# Altium PCB PCB1.PcbDoc (part 3 of 6)
Units mil, origin at the board's own origin, x right, y up, seen from the top; angles counter-clockwise.
Board outline 1280 x 1960 mil, 2 copper layers (Top Layer, Bottom Layer); 45 components, 63 nets, 326 pads, 83 vias.
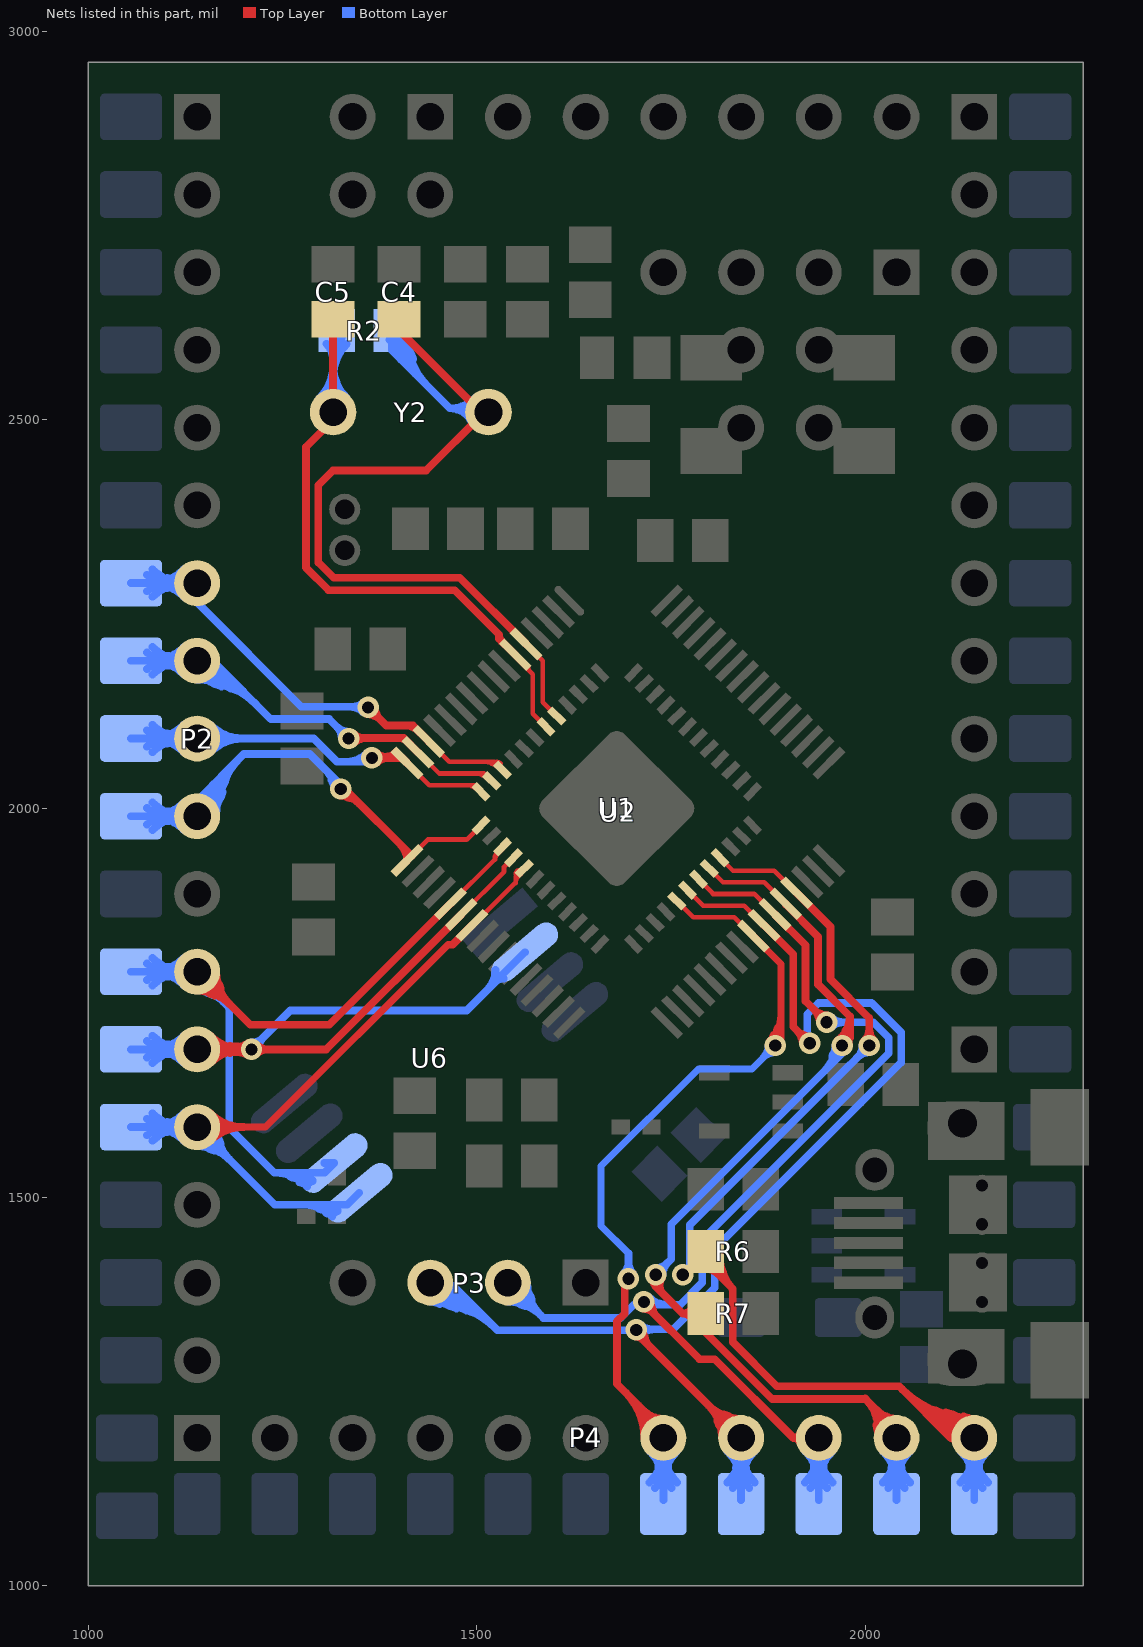
[diagram p3: the nets of this part, all layers, seen from the top]

## Via types
v1: diameter 27.56, hole 15.75, Top Layer to Bottom Layer, tented both sides, 79 vias
v2: diameter 23.62, hole 13.78, Top Layer to Bottom Layer, tented both sides, 3 vias
v3: diameter 23.62, hole 13.78, Top Layer to Bottom Layer, tented top, 1 vias

## Nets (pads, with @x,y where several pads share a name; then routed paths per layer and width w, separated by ;. In a path a pad name is that pad's centre, name@x,y a point inside that pad or via, vN(x,y) a via of type N, cw(c..) or ccw(c..) an arc to the next point about the centre after c; other vN are vias at no path point) (continued)
OSCI: C4.2 R2.1 U1.5 U2.5 Y2.1 | length 1734.6
  Top Layer w6: U2.5@1563.36,2211.56 1585,2189.92 1585,2136.76 U1.5@1602.75,2119.01 U1.5@1602.75,2121.5
  Top Layer w10: C4.2@1405,2619.57 1405,2610 Y2.1@1507.5,2507.5 ; Y2.1@1515,2515 Y2.1@1507.5,2507.5 ; U2.5@1563.36,2211.56 1478.14,2296.78 1315.85,2296.78 1296,2316.63 1296,2416 1315,2435 1435,2435 Y2.1@1507.5,2507.5
  Bottom Layer w10: R2.1@1387.18,2603.08 cw(c1374.23,2571.37) 1407.32,2580.24 ; R2.1@1390.43,2615 1390.43,2589.57 1465,2515 ; R2.1@1391.1,2612.27 cw(c1364.19,2563.59) 1417.92,2577.98 ; R2.1@1404.91,2589.21 cw(c1420.87,2593.49) R2.1@1406.56,2601.75 ; Y2.1@1515,2515 1465,2515 ; 1465,2515 cw(c1465,2483.34) 1492.94,2498.24 ccw(c1465,2483.34) 1465,2515 ; R2.1@1389.05,2611.06 ccw(c1437.62,2611.06) 1403.28,2576.72 cw(c1437.62,2611.06) R2.1@1389.05,2611.06 ; R2.1@1399.05,2611.06 ccw(c1471.77,2611.06) 1420.35,2559.65 cw(c1471.77,2611.06) R2.1@1399.05,2611.06 ; R2.1@1409.05,2611.06 ccw(c1505.91,2611.06) 1437.42,2542.58 cw(c1505.91,2611.06) R2.1@1409.05,2611.06 ; 1466.72,2515 ccw(c1466.72,2558.28) 1497.32,2527.68 cw(c1466.72,2558.28) 1466.72,2515 ; 1481.67,2515 cw(c1481.67,2492.22) 1501.76,2502.94 ccw(c1481.67,2492.22) 1481.67,2515
OSCO: C5.2 R2.2 U1.6 U2.6 Y2.2 | length 1400.7
  Top Layer w6: U2.6@1549.44,2197.64 1549.44,2195.26 1571.81,2172.88 1571.81,2122.11 U1.6@1588.83,2105.09 ; U2.6@1565.58,2183.5 ccw(c1576.17,2183.5) 1568.68,2176.01 cw(c1576.17,2183.5) U2.6@1565.58,2183.5
  Top Layer w10: C5.2@1315,2619.57 1315,2515 1315,2500 1280,2465 1280,2310 1309.22,2280.78 1471.51,2280.78 1528.65,2223.65 ; U2.6@1549.44,2197.64 1528.65,2218.43 1528.65,2223.65 ; 1528.65,2223.64 ccw(c1542.55,2223.64) 1535.3,2211.78 cw(c1542.55,2223.64) 1528.65,2223.64
  Bottom Layer w10: Y2.2@1315,2515 1315,2610.43 R2.2@1319.57,2615 ; 1315,2546.21 cw(c1278.79,2546.21) 1304.39,2520.61 ccw(c1278.79,2546.21) 1315,2546.21 ; 1315,2546.21 ccw(c1351.21,2546.21) 1325.61,2520.61 cw(c1351.21,2546.21) 1315,2546.21 ; 1315,2570.36 cw(c1254.64,2570.36) 1297.32,2527.68 ccw(c1254.64,2570.36) 1315,2570.36 ; 1315,2570.36 ccw(c1375.36,2570.36) 1332.68,2527.68 cw(c1375.36,2570.36) 1315,2570.36 ; R2.2@1306.4,2597.9 cw(c1285.63,2577.13) 1315,2577.13 ccw(c1285.63,2577.13) R2.2@1306.4,2597.9 ; 1315,2555.08 cw(c1375.55,2555.08) 1332.73,2597.9 ccw(c1375.55,2555.08) 1315,2555.08 ; 1315,2579.22 cw(c1351.41,2579.22) 1325.66,2604.97 ccw(c1351.41,2579.22) 1315,2579.22
PA0: P2.7 pad.1@1055,2290 U1.10 U2.14 | length 1775.8
  Top Layer w6: U2.14@1438.08,2086.28 1464.37,2060 1522.56,2060 U1.10@1533.15,2049.41 ; 1518.76,2057.93 ccw(c1524.24,2067.44) U1.10@1527.08,2056.84 ; 1510.83,2060 cw(c1510.83,2038.23) 1526.22,2053.62 ccw(c1510.83,2038.23) 1510.83,2060 ; 1525.31,2060 cw(c1525.31,2052.71) 1530.47,2057.87 ccw(c1525.31,2052.71) 1525.31,2060
  Top Layer w10: v1@1358.8,2129.76 ccw(c1372.87,2132.64) 1369.15,2118.77 ; v1(1360,2130) 1383.34,2106.66 1417.71,2106.66 U2.14@1438.08,2086.28 ; v1@1360.24,2131.2 cw(c1357.36,2117.13) 1371.23,2120.85 ; 1374.99,2115.01 cw(c1389.98,2130) 1368.78,2130 ccw(c1389.98,2130) 1374.99,2115.01 ; 1374.99,2115.01 ccw(c1360,2100.02) 1360,2121.22 cw(c1360,2100.02) 1374.99,2115.01 ; 1408.89,2106.66 cw(c1408.89,2085.38) 1423.94,2100.43 ccw(c1408.89,2085.38) 1408.89,2106.66
  Bottom Layer w10: pad.1@1055,2290 P2.7@1140,2290 1140,2265 1274,2131 1359,2131 v1(1360,2130) ; P2.7@1116.78,2282.1 ccw(c1095.78,2274.96) 1101.52,2296.39 ccw(c1105.72,2312.07) P2.7@1119.38,2303.28 ; P2.7@1116.78,2297.9 cw(c1095.78,2305.04) 1101.52,2283.61 cw(c1105.72,2267.93) P2.7@1119.38,2276.72 ; pad.1@1080.79,2290 cw(c1080.79,2230.79) 1122.66,2272.66 ccw(c1080.79,2230.79) pad.1@1080.79,2290 ; pad.1@1080.79,2290 ccw(c1080.79,2349.21) 1122.66,2307.34 cw(c1080.79,2349.21) pad.1@1080.79,2290 ; pad.1@1086.36,2277.01 cw(c1099.56,2268.97) 1103.56,2283.9 ; pad.1@1086.36,2277.01 cw(c1099.56,2268.97) 1103.56,2283.9 ; pad.1@1086.36,2277.01 cw(c1099.56,2268.97) 1103.56,2283.9 ; pad.1@1086.36,2302.99 ccw(c1099.56,2311.03) 1103.56,2296.1 ; pad.1@1086.36,2302.99 ccw(c1099.56,2311.03) 1103.56,2296.1 ; pad.1@1086.36,2302.99 ccw(c1099.56,2311.03) 1103.56,2296.1 ; pad.1@1088.73,2282.12 cw(c1109.12,2275.35) 1103.56,2296.1 ; pad.1@1088.73,2282.12 cw(c1109.12,2275.35) 1103.56,2296.1 ; pad.1@1088.73,2282.12 cw(c1109.12,2275.35) 1103.56,2296.1 ; pad.1@1088.73,2297.88 ccw(c1109.12,2304.65) 1103.56,2283.9 ; pad.1@1088.73,2297.88 ccw(c1109.12,2304.65) 1103.56,2283.9 ; pad.1@1088.73,2297.88 ccw(c1109.12,2304.65) 1103.56,2283.9 ; 1101.21,2290 cw(c1101.21,2326.21) 1075.61,2300.61 ccw(c1101.21,2326.21) 1101.21,2290 ; 1101.21,2290 ccw(c1101.21,2253.79) 1075.61,2279.39 cw(c1101.21,2253.79) 1101.21,2290 ; 1104.93,2290 cw(c1104.93,2254.93) 1129.73,2279.73 ccw(c1104.93,2254.93) 1104.93,2290 ; 1104.93,2290 ccw(c1104.93,2325.07) 1129.73,2300.27 cw(c1104.93,2325.07) 1104.93,2290 ; P2.7@1125.36,2290 cw(c1125.36,2350.36) 1082.68,2307.68 ccw(c1125.36,2350.36) P2.7@1125.36,2290 ; P2.7@1125.36,2290 ccw(c1125.36,2229.64) 1082.68,2272.32 cw(c1125.36,2229.64) P2.7@1125.36,2290 ; 1336.39,2131 cw(c1336.39,2106.39) 1353.79,2123.79 ccw(c1336.39,2106.39) 1336.39,2131 ; 1341.22,2131 ccw(c1341.22,2148.78) 1353.79,2136.21 cw(c1341.22,2148.78) 1341.22,2131
PA1: P2.8 pad.1@1055,2190 U1.11 U2.15 | length 2194.5
  Top Layer w6: U2.15@1424.17,2072.36 1451.53,2045 1509.72,2045 U1.11@1519.23,2035.49 ; 1505.13,2043.85 ccw(c1510.22,2052.67) U1.11@1513.12,2042.9 ; 1499.52,2045 cw(c1499.52,2026.92) 1512.3,2039.7 ccw(c1499.52,2026.92) 1499.52,2045
  Top Layer w10: v1(1335,2090) 1335.66,2090.66 1405.87,2090.66 U2.15@1424.17,2072.36 ; v1@1341.21,2083.79 cw(c1357.79,2067.21) 1357.79,2090.66 ccw(c1357.79,2067.21) v1@1341.21,2083.79 ; v1@1341.21,2096.21 ccw(c1354.6,2109.6) 1354.6,2090.66 cw(c1354.6,2109.6) v1@1341.21,2096.21 ; 1400,2090.66 cw(c1400,2076.48) 1410.02,2086.51 ccw(c1400,2076.48) 1400,2090.66
  Bottom Layer w10: pad.1@1055,2190 P2.8@1140,2190 1160,2190 1235,2115 1310,2115 v1(1335,2090) ; P2.8@1116.78,2182.1 ccw(c1095.78,2174.96) 1101.52,2196.39 ccw(c1105.72,2212.07) P2.8@1119.38,2203.28 ; P2.8@1116.78,2197.9 cw(c1095.78,2205.04) 1101.52,2183.61 cw(c1105.72,2167.93) P2.8@1119.38,2176.72 ; P2.8@1135.03,2187.7 ccw(c1186.01,2211.29) 1171.47,2157.04 ; P2.8@1144.11,2191.9 ccw(c1211.26,2222.98) 1192.11,2151.51 ; P2.8@1144.3,2191.41 ccw(c1178.9,2202.74) 1169.48,2167.57 ; pad.1@1080.79,2190 cw(c1080.79,2130.79) 1122.66,2172.66 ccw(c1080.79,2130.79) pad.1@1080.79,2190 ; pad.1@1080.79,2190 ccw(c1080.79,2249.21) 1122.66,2207.34 cw(c1080.79,2249.21) pad.1@1080.79,2190 ; pad.1@1086.36,2177.01 cw(c1099.56,2168.97) 1103.56,2183.9 ; pad.1@1086.36,2177.01 cw(c1099.56,2168.97) 1103.56,2183.9 ; pad.1@1086.36,2177.01 cw(c1099.56,2168.97) 1103.56,2183.9 ; pad.1@1086.36,2202.99 ccw(c1099.56,2211.03) 1103.56,2196.1 ; pad.1@1086.36,2202.99 ccw(c1099.56,2211.03) 1103.56,2196.1 ; pad.1@1086.36,2202.99 ccw(c1099.56,2211.03) 1103.56,2196.1 ; pad.1@1088.73,2182.12 cw(c1109.12,2175.35) 1103.56,2196.1 ; pad.1@1088.73,2182.12 cw(c1109.12,2175.35) 1103.56,2196.1 ; pad.1@1088.73,2182.12 cw(c1109.12,2175.35) 1103.56,2196.1 ; pad.1@1088.73,2197.88 ccw(c1109.12,2204.65) 1103.56,2183.9 ; pad.1@1088.73,2197.88 ccw(c1109.12,2204.65) 1103.56,2183.9 ; pad.1@1088.73,2197.88 ccw(c1109.12,2204.65) 1103.56,2183.9 ; 1101.21,2190 cw(c1101.21,2226.21) 1075.61,2200.61 ccw(c1101.21,2226.21) 1101.21,2190 ; 1101.21,2190 ccw(c1101.21,2153.79) 1075.61,2179.39 cw(c1101.21,2153.79) 1101.21,2190 ; 1104.93,2190 cw(c1104.93,2154.93) 1129.73,2179.73 ccw(c1104.93,2154.93) 1104.93,2190 ; 1104.93,2190 ccw(c1104.93,2225.07) 1129.73,2200.27 cw(c1104.93,2225.07) 1104.93,2190 ; P2.8@1125.36,2190 cw(c1125.36,2250.36) 1082.68,2207.68 ccw(c1125.36,2250.36) P2.8@1125.36,2190 ; P2.8@1125.36,2190 ccw(c1125.36,2129.64) 1082.68,2172.32 cw(c1125.36,2129.64) P2.8@1125.36,2190 ; 1320.01,2104.99 cw(c1305.02,2090) 1326.22,2090 ccw(c1305.02,2090) 1320.01,2104.99 ; 1320.01,2104.99 ccw(c1335,2119.98) 1335,2098.78 cw(c1335,2119.98) 1320.01,2104.99 ; P2.8@1140,2165.47 cw(c1140,2057.97) 1216.01,2133.99 ccw(c1140,2057.97) P2.8@1140,2165.47 ; P2.8@1140,2175.47 cw(c1140,2092.12) 1198.94,2151.06 ccw(c1140,2092.12) P2.8@1140,2175.47 ; P2.8@1140,2185.47 cw(c1140,2126.26) 1181.87,2168.13 ccw(c1140,2126.26) P2.8@1140,2185.47
PA2: P2.9 pad.1@1055,2090 U1.12 U2.16 | length 1956.8
  Top Layer w6: U2.16@1410.25,2058.45 1438.69,2030 1496.89,2030 U1.12@1505.31,2021.58 ; 1492.86,2028.97 ccw(c1495.97,2034.36) U1.12@1498.85,2028.85 ; 1488.21,2030 cw(c1488.21,2015.61) 1498.39,2025.79 ccw(c1488.21,2015.61) 1488.21,2030
  Top Layer w10: v1(1365,2065) 1403.69,2065 U2.16@1410.25,2058.45 ; v1@1371.44,2070.96 ccw(c1381.62,2080.37) 1385.2,2066.99 ; v1@1371.44,2070.96 ccw(c1381.62,2080.37) 1385.2,2066.99 ; v1@1371.44,2070.96 ccw(c1381.62,2080.37) 1385.2,2066.99 ; 1386.2,2065 cw(c1386.2,2086.2) 1371.21,2071.21 ccw(c1386.2,2086.2) 1386.2,2065 ; 1386.2,2065 ccw(c1386.2,2043.8) 1371.21,2058.79 cw(c1386.2,2043.8) 1386.2,2065 ; v1@1377.78,2065 ccw(c1377.78,2090.91) 1396.1,2072.59 cw(c1377.78,2090.91) v1@1377.78,2065 ; U2.16@1401.93,2065 ccw(c1401.93,2066.77) 1403.17,2065.52 cw(c1401.93,2066.77) U2.16@1401.93,2065
  Bottom Layer w10: pad.1@1055,2090 P2.9@1140,2090 1290,2090 1320,2060 v1@1370,2060 ; P2.9@1116.78,2082.1 ccw(c1095.78,2074.96) 1101.52,2096.39 ccw(c1105.72,2112.07) P2.9@1119.38,2103.28 ; P2.9@1116.78,2097.9 cw(c1095.78,2105.04) 1101.52,2083.61 cw(c1105.72,2067.93) P2.9@1119.38,2076.72 ; pad.1@1080.79,2090 cw(c1080.79,2030.79) 1122.66,2072.66 ccw(c1080.79,2030.79) pad.1@1080.79,2090 ; pad.1@1080.79,2090 ccw(c1080.79,2149.21) 1122.66,2107.34 cw(c1080.79,2149.21) pad.1@1080.79,2090 ; pad.1@1086.36,2077.01 cw(c1099.56,2068.97) 1103.56,2083.9 ; pad.1@1086.36,2077.01 cw(c1099.56,2068.97) 1103.56,2083.9 ; pad.1@1086.36,2077.01 cw(c1099.56,2068.97) 1103.56,2083.9 ; pad.1@1086.36,2102.99 ccw(c1099.56,2111.03) 1103.56,2096.1 ; pad.1@1086.36,2102.99 ccw(c1099.56,2111.03) 1103.56,2096.1 ; pad.1@1086.36,2102.99 ccw(c1099.56,2111.03) 1103.56,2096.1 ; pad.1@1088.73,2082.12 cw(c1109.12,2075.35) 1103.56,2096.1 ; pad.1@1088.73,2082.12 cw(c1109.12,2075.35) 1103.56,2096.1 ; pad.1@1088.73,2082.12 cw(c1109.12,2075.35) 1103.56,2096.1 ; pad.1@1088.73,2097.88 ccw(c1109.12,2104.65) 1103.56,2083.9 ; pad.1@1088.73,2097.88 ccw(c1109.12,2104.65) 1103.56,2083.9 ; pad.1@1088.73,2097.88 ccw(c1109.12,2104.65) 1103.56,2083.9 ; 1101.21,2090 cw(c1101.21,2126.21) 1075.61,2100.61 ccw(c1101.21,2126.21) 1101.21,2090 ; 1101.21,2090 ccw(c1101.21,2053.79) 1075.61,2079.39 cw(c1101.21,2053.79) 1101.21,2090 ; 1104.93,2090 cw(c1104.93,2054.93) 1129.73,2079.73 ccw(c1104.93,2054.93) 1104.93,2090 ; 1104.93,2090 ccw(c1104.93,2125.07) 1129.73,2100.27 cw(c1104.93,2125.07) 1104.93,2090 ; P2.9@1125.36,2090 cw(c1125.36,2150.36) 1082.68,2107.68 ccw(c1125.36,2150.36) P2.9@1125.36,2090 ; P2.9@1125.36,2090 ccw(c1125.36,2029.64) 1082.68,2072.32 cw(c1125.36,2029.64) P2.9@1125.36,2090 ; 1175.07,2090 cw(c1175.07,2125.07) 1150.27,2100.27 ccw(c1175.07,2125.07) 1175.07,2090 ; 1175.07,2090 ccw(c1175.07,2054.93) 1150.27,2079.73 cw(c1175.07,2054.93) 1175.07,2090 ; 1199.21,2090 cw(c1199.21,2149.21) 1157.34,2107.34 ccw(c1199.21,2149.21) 1199.21,2090 ; 1199.21,2090 ccw(c1199.21,2030.79) 1157.34,2072.66 cw(c1199.21,2030.79) 1199.21,2090 ; 1331.73,2060 ccw(c1331.73,2098.27) 1358.79,2071.21 cw(c1331.73,2098.27) 1331.73,2060
PA3: P2.10 pad.1@1055,1990 U1.13 U2.17 | length 2241.7
  Top Layer w6: U2.17@1410.25,1933.17 1437.08,1960 1486.89,1960 U1.13@1505.31,1978.42
  Top Layer w10: v1@1323.86,2024.55 ccw(c1341.63,2031.52) 1336.69,2013.09 ; v1(1325,2025) 1330,2025 U2.17@1416.04,1938.96 ; v1@1325,2016.22 cw(c1325,1982.95) 1348.52,2006.48 ccw(c1325,1982.95) v1@1325,2016.22 ; 1402.05,1952.95 cw(c1382.28,1933.17) U2.17@1410.25,1933.17 ccw(c1382.28,1933.17) 1402.05,1952.95
  Bottom Layer w10: pad.1@1055,1990 P2.10@1140,1990 1140,2010 1200,2070 1285,2070 1330,2025 v1(1325,2025) ; P2.10@1116.78,1982.1 ccw(c1095.78,1974.96) 1101.52,1996.39 ccw(c1105.72,2012.07) P2.10@1119.38,2003.28 ; P2.10@1116.78,1997.9 cw(c1095.78,2005.04) 1101.52,1983.61 cw(c1105.72,1967.93) P2.10@1119.38,1976.72 ; P2.10@1138.1,1994.11 ccw(c1107.02,2061.26) 1178.49,2042.11 ; P2.10@1138.59,1994.3 ccw(c1127.26,2028.9) 1162.43,2019.48 ; P2.10@1142.3,1985.03 ccw(c1118.71,2036.01) 1172.96,2021.47 ; 1313.09,2036.69 ccw(c1331.52,2041.63) v1@1324.55,2023.86 ; pad.1@1080.79,1990 cw(c1080.79,1930.79) 1122.66,1972.66 ccw(c1080.79,1930.79) pad.1@1080.79,1990 ; pad.1@1080.79,1990 ccw(c1080.79,2049.21) 1122.66,2007.34 cw(c1080.79,2049.21) pad.1@1080.79,1990 ; pad.1@1086.36,1977.01 cw(c1099.56,1968.97) 1103.56,1983.9 ; pad.1@1086.36,1977.01 cw(c1099.56,1968.97) 1103.56,1983.9 ; pad.1@1086.36,1977.01 cw(c1099.56,1968.97) 1103.56,1983.9 ; pad.1@1086.36,2002.99 ccw(c1099.56,2011.03) 1103.56,1996.1 ; pad.1@1086.36,2002.99 ccw(c1099.56,2011.03) 1103.56,1996.1 ; pad.1@1086.36,2002.99 ccw(c1099.56,2011.03) 1103.56,1996.1 ; pad.1@1088.73,1982.12 cw(c1109.12,1975.35) 1103.56,1996.1 ; pad.1@1088.73,1982.12 cw(c1109.12,1975.35) 1103.56,1996.1 ; pad.1@1088.73,1982.12 cw(c1109.12,1975.35) 1103.56,1996.1 ; pad.1@1088.73,1997.88 ccw(c1109.12,2004.65) 1103.56,1983.9 ; pad.1@1088.73,1997.88 ccw(c1109.12,2004.65) 1103.56,1983.9 ; pad.1@1088.73,1997.88 ccw(c1109.12,2004.65) 1103.56,1983.9 ; 1101.21,1990 cw(c1101.21,2026.21) 1075.61,2000.61 ccw(c1101.21,2026.21) 1101.21,1990 ; 1101.21,1990 ccw(c1101.21,1953.79) 1075.61,1979.39 cw(c1101.21,1953.79) 1101.21,1990 ; 1104.93,1990 cw(c1104.93,1954.93) 1129.73,1979.73 ccw(c1104.93,1954.93) 1104.93,1990 ; 1104.93,1990 ccw(c1104.93,2025.07) 1129.73,2000.27 cw(c1104.93,2025.07) 1104.93,1990 ; P2.10@1125.36,1990 cw(c1125.36,2050.36) 1082.68,2007.68 ccw(c1125.36,2050.36) P2.10@1125.36,1990 ; P2.10@1125.36,1990 ccw(c1125.36,1929.64) 1082.68,1972.32 cw(c1125.36,1929.64) P2.10@1125.36,1990 ; P2.10@1144.53,1990 cw(c1203.74,1990) 1161.87,2031.87 ccw(c1203.74,1990) P2.10@1144.53,1990 ; P2.10@1154.53,1990 cw(c1237.88,1990) 1178.94,2048.94 ccw(c1237.88,1990) P2.10@1154.53,1990 ; P2.10@1164.53,1990 cw(c1272.03,1990) 1196.01,2066.01 ccw(c1272.03,1990) P2.10@1164.53,1990 ; 1306.48,2048.52 cw(c1282.95,2025) 1316.22,2025 ccw(c1282.95,2025) 1306.48,2048.52
PA5: P2.12 pad.1@1055,1790 U1.15 U2.21 U6.6 | length 2889.3
  Top Layer w6: U2.21@1465.92,1877.49 1523.43,1935 1523.43,1938.43 ; 1524.81,1939.4 ccw(c1521.39,1942.64) U1.15@1525.79,1944.33 ; U1.15@1533.15,1950.59 1533.15,1948.15 1523.43,1938.43 ; 1523.43,1938.43 ccw(c1517.91,1943.95) 1525.67,1944.81 cw(c1517.91,1943.95) 1523.43,1938.43 ; 1523.43,1934.17 cw(c1534.23,1934.17) 1528.59,1943.38 ccw(c1534.23,1934.17) 1523.43,1934.17 ; 1523.43,1937.23 cw(c1529.54,1937.23) 1528.05,1943.15 ccw(c1529.54,1937.23) 1523.43,1937.23
  Top Layer w10: P2.12@1134.64,1788.9 ccw(c1172.3,1796.61) 1162.35,1759.48 ; P2.12@1140,1790 1208.43,1721.57 1310,1721.57 U2.21@1465.92,1877.49 ; P2.12@1141.1,1795.36 cw(c1133.39,1757.7) 1170.52,1767.65 ; 1164.8,1765.2 cw(c1189.6,1790) 1154.53,1790 ccw(c1189.6,1790) 1164.8,1765.2 ; 1164.8,1765.2 ccw(c1140,1740.4) 1140,1775.47 cw(c1140,1740.4) 1164.8,1765.2 ; 1181.87,1748.13 cw(c1223.74,1790) 1164.53,1790 ccw(c1223.74,1790) 1181.87,1748.13 ; 1181.87,1748.13 ccw(c1140,1706.26) 1140,1765.47 cw(c1140,1706.26) 1181.87,1748.13
  Bottom Layer w10: pad.1@1055,1790 P2.12@1140,1790 1140,1785 1181.33,1743.67 1181.33,1589.2 1239.25,1531.28 ; P2.12@1116.78,1782.1 ccw(c1095.78,1774.96) 1101.52,1796.39 ccw(c1105.72,1812.07) P2.12@1119.38,1803.28 ; P2.12@1116.78,1797.9 cw(c1095.78,1805.04) 1101.52,1783.61 cw(c1105.72,1767.93) P2.12@1119.38,1776.72 ; P2.12@1134.57,1789.31 ccw(c1169.07,1793.68) 1160.07,1760.1 ; P2.12@1142.23,1795 cw(c1122.33,1750.5) 1170.13,1760.03 ; 1260.14,1526.18 ccw(c1269.36,1541.76) U6.6@1281.9,1528.7 ; 1271.46,1519.48 ccw(c1278.82,1531.91) U6.6@1288.83,1521.49 ; U6.6@1303.73,1543.73 U6.6@1316.49,1543.73 1304.04,1531.28 1239.25,1531.28 ; pad.1@1080.79,1790 cw(c1080.79,1730.79) 1122.66,1772.66 ccw(c1080.79,1730.79) pad.1@1080.79,1790 ; pad.1@1080.79,1790 ccw(c1080.79,1849.21) 1122.66,1807.34 cw(c1080.79,1849.21) pad.1@1080.79,1790 ; pad.1@1086.36,1777.01 cw(c1099.56,1768.97) 1103.56,1783.9 ; pad.1@1086.36,1777.01 cw(c1099.56,1768.97) 1103.56,1783.9 ; pad.1@1086.36,1777.01 cw(c1099.56,1768.97) 1103.56,1783.9 ; pad.1@1086.36,1802.99 ccw(c1099.56,1811.03) 1103.56,1796.1 ; pad.1@1086.36,1802.99 ccw(c1099.56,1811.03) 1103.56,1796.1 ; pad.1@1086.36,1802.99 ccw(c1099.56,1811.03) 1103.56,1796.1 ; pad.1@1088.73,1782.12 cw(c1109.12,1775.35) 1103.56,1796.1 ; pad.1@1088.73,1782.12 cw(c1109.12,1775.35) 1103.56,1796.1 ; pad.1@1088.73,1782.12 cw(c1109.12,1775.35) 1103.56,1796.1 ; pad.1@1088.73,1797.88 ccw(c1109.12,1804.65) 1103.56,1783.9 ; pad.1@1088.73,1797.88 ccw(c1109.12,1804.65) 1103.56,1783.9 ; pad.1@1088.73,1797.88 ccw(c1109.12,1804.65) 1103.56,1783.9 ; 1101.21,1790 cw(c1101.21,1826.21) 1075.61,1800.61 ccw(c1101.21,1826.21) 1101.21,1790 ; 1101.21,1790 ccw(c1101.21,1753.79) 1075.61,1779.39 cw(c1101.21,1753.79) 1101.21,1790 ; 1104.93,1790 cw(c1104.93,1754.93) 1129.73,1779.73 ccw(c1104.93,1754.93) 1104.93,1790 ; 1104.93,1790 ccw(c1104.93,1825.07) 1129.73,1800.27 cw(c1104.93,1825.07) 1104.93,1790 ; P2.12@1125.36,1790 cw(c1125.36,1850.36) 1082.68,1807.68 ccw(c1125.36,1850.36) P2.12@1125.36,1790 ; P2.12@1125.36,1790 ccw(c1125.36,1729.64) 1082.68,1772.32 cw(c1125.36,1729.64) P2.12@1125.36,1790 ; 1239.25,1531.28 cw(c1239.25,1471.94) 1281.67,1513.44 ccw(c1239.25,1471.94) 1239.25,1531.28 ; P2.12@1140,1765.47 cw(c1140,1718.33) 1173.34,1751.66 ccw(c1140,1718.33) P2.12@1140,1765.47 ; P2.12@1154.5,1789.06 ccw(c1192.97,1786.55) 1165.71,1759.29 cw(c1192.97,1786.55) P2.12@1154.5,1789.06 ; P2.12@1164.48,1788.41 ccw(c1222.29,1784.65) 1181.32,1743.68 cw(c1222.29,1784.65) P2.12@1164.48,1788.41 ; 1263.03,1531.28 cw(c1263.03,1495.2) 1288.81,1520.43 ccw(c1263.03,1495.2) 1263.03,1531.28
PA6: P2.13 pad.1@1055,1690 U1.16 U2.22 U6.2 | length 2718.2
  Top Layer w6: U2.22@1479.84,1863.57 1535,1918.73 1535,1925 1546.67,1936.67 U1.16@1547.07,1936.67 ; 1537.53,1927.53 cw(c1541.5,1923.56) 1541.5,1929.18 ccw(c1541.5,1923.56) 1537.53,1927.53
  Top Layer w10: P2.13@1140,1690 v1(1210,1690) 1306.27,1690 U2.22@1479.84,1863.57 ; 1175.07,1690 cw(c1175.07,1725.07) 1150.27,1700.27 ccw(c1175.07,1725.07) 1175.07,1690 ; 1175.07,1690 ccw(c1175.07,1654.93) 1150.27,1679.73 cw(c1175.07,1654.93) 1175.07,1690 ; 1182.29,1685.47 cw(c1190.25,1655.79) v1@1205.61,1682.4 ; 1182.29,1685.47 cw(c1190.25,1655.79) v1@1205.61,1682.4 ; 1182.29,1685.47 cw(c1190.25,1655.79) v1@1205.61,1682.4 ; 1182.29,1694.53 ccw(c1190.25,1724.21) v1@1205.61,1697.6 ; 1182.29,1694.53 ccw(c1190.25,1724.21) v1@1205.61,1697.6 ; 1182.29,1694.53 ccw(c1190.25,1724.21) v1@1205.61,1697.6 ; 1188.8,1690 cw(c1188.8,1668.8) 1203.79,1683.79 ccw(c1188.8,1668.8) 1188.8,1690 ; 1188.8,1690 ccw(c1188.8,1711.2) 1203.79,1696.21 cw(c1188.8,1711.2) 1188.8,1690 ; 1195.31,1688.95 ccw(c1192.29,1700.22) v1@1202.4,1694.39 ; 1195.31,1688.95 ccw(c1192.29,1700.22) v1@1202.4,1694.39 ; 1195.31,1688.95 ccw(c1192.29,1700.22) v1@1202.4,1694.39 ; 1195.31,1691.05 cw(c1192.29,1679.78) v1@1202.4,1685.61 ; 1195.31,1691.05 cw(c1192.29,1679.78) v1@1202.4,1685.61 ; 1195.31,1691.05 cw(c1192.29,1679.78) v1@1202.4,1685.61 ; v1@1199.21,1690 cw(c1199.21,1749.21) 1157.34,1707.34 ccw(c1199.21,1749.21) v1@1199.21,1690 ; v1@1199.21,1690 ccw(c1199.21,1630.79) 1157.34,1672.66 cw(c1199.21,1630.79) v1@1199.21,1690 ; 1231.2,1690 cw(c1231.2,1711.2) 1216.21,1696.21 ccw(c1231.2,1711.2) 1231.2,1690 ; 1231.2,1690 ccw(c1231.2,1668.8) 1216.21,1683.79 cw(c1231.2,1668.8) 1231.2,1690
  Bottom Layer w10: pad.1@1055,1690 P2.13@1140,1690 ; P2.13@1116.78,1682.1 ccw(c1095.78,1674.96) 1101.52,1696.39 ccw(c1105.72,1712.07) P2.13@1119.38,1703.28 ; P2.13@1116.78,1697.9 cw(c1095.78,1705.04) 1101.52,1683.61 cw(c1105.72,1667.93) P2.13@1119.38,1676.72 ; v1(1210,1690) 1260,1740 1486.97,1740 U6.2@1561.82,1814.85 ; pad.1@1080.79,1690 cw(c1080.79,1630.79) 1122.66,1672.66 ccw(c1080.79,1630.79) pad.1@1080.79,1690 ; pad.1@1080.79,1690 ccw(c1080.79,1749.21) 1122.66,1707.34 cw(c1080.79,1749.21) pad.1@1080.79,1690 ; pad.1@1086.36,1677.01 cw(c1099.56,1668.97) 1103.56,1683.9 ; pad.1@1086.36,1677.01 cw(c1099.56,1668.97) 1103.56,1683.9 ; pad.1@1086.36,1677.01 cw(c1099.56,1668.97) 1103.56,1683.9 ; pad.1@1086.36,1702.99 ccw(c1099.56,1711.03) 1103.56,1696.1 ; pad.1@1086.36,1702.99 ccw(c1099.56,1711.03) 1103.56,1696.1 ; pad.1@1086.36,1702.99 ccw(c1099.56,1711.03) 1103.56,1696.1 ; pad.1@1088.73,1682.12 cw(c1109.12,1675.35) 1103.56,1696.1 ; pad.1@1088.73,1682.12 cw(c1109.12,1675.35) 1103.56,1696.1 ; pad.1@1088.73,1682.12 cw(c1109.12,1675.35) 1103.56,1696.1 ; pad.1@1088.73,1697.88 ccw(c1109.12,1704.65) 1103.56,1683.9 ; pad.1@1088.73,1697.88 ccw(c1109.12,1704.65) 1103.56,1683.9 ; pad.1@1088.73,1697.88 ccw(c1109.12,1704.65) 1103.56,1683.9 ; 1101.21,1690 cw(c1101.21,1726.21) 1075.61,1700.61 ccw(c1101.21,1726.21) 1101.21,1690 ; 1101.21,1690 ccw(c1101.21,1653.79) 1075.61,1679.39 cw(c1101.21,1653.79) 1101.21,1690 ; 1104.93,1690 cw(c1104.93,1654.93) 1129.73,1679.73 ccw(c1104.93,1654.93) 1104.93,1690 ; 1104.93,1690 ccw(c1104.93,1725.07) 1129.73,1700.27 cw(c1104.93,1725.07) 1104.93,1690 ; P2.13@1125.36,1690 cw(c1125.36,1750.36) 1082.68,1707.68 ccw(c1125.36,1750.36) P2.13@1125.36,1690 ; P2.13@1125.36,1690 ccw(c1125.36,1629.64) 1082.68,1672.32 cw(c1125.36,1629.64) P2.13@1125.36,1690 ; 1224.99,1704.99 cw(c1210,1719.98) 1210,1698.78 ccw(c1210,1719.98) 1224.99,1704.99 ; 1224.99,1704.99 ccw(c1239.98,1690) 1218.78,1690 cw(c1239.98,1690) 1224.99,1704.99 ; 1513.24,1766.27 ccw(c1487.44,1792.08) 1523.93,1792.08 cw(c1487.44,1792.08) 1513.24,1766.27 ; 1523.78,1776.82 cw(c1534.67,1765.92) 1534.67,1781.33 ccw(c1534.67,1765.92) 1523.78,1776.82
PA7: P2.14 pad.1@1055,1590 U1.17 U2.23 U6.5 | length 2748
  Top Layer w6: 1463.19,1825 1463.54,1825 ; U2.23@1493.76,1849.65 1494.65,1849.65 1550,1905 1550,1911.76 U1.17@1560.99,1922.75 ; 1551.69,1910.4 ccw(c1546.21,1915.45) U1.17@1553.53,1916.82 ; U2.23@1507.9,1865.8 ccw(c1507.9,1872.78) 1512.84,1867.84 cw(c1507.9,1872.78) U2.23@1507.9,1865.8 ; 1550,1903.85 cw(c1563.85,1903.85) 1556.45,1915.56 ccw(c1563.85,1903.85) 1550,1903.85 ; 1550,1909.52 cw(c1555.75,1909.52) 1555.5,1915.26 ccw(c1555.75,1909.52) 1550,1909.52 ; 1550,1914.74 cw(c1556.96,1914.74) 1553.24,1920.63 ccw(c1556.96,1914.74) 1550,1914.74
  Top Layer w9: 1200,1590 1228.19,1590 1463.19,1825
  Top Layer w10: P2.14@1140,1590 1200,1590 ; 1463.54,1824.65 1468.75,1824.65 U2.23@1493.76,1849.65 ; 1175.07,1590 cw(c1175.07,1625.07) 1150.27,1600.27 ccw(c1175.07,1625.07) 1175.07,1590 ; 1175.07,1590 ccw(c1175.07,1554.93) 1150.27,1579.73 cw(c1175.07,1554.93) 1175.07,1590 ; 1199.21,1590 cw(c1199.21,1649.21) 1157.34,1607.34 ccw(c1199.21,1649.21) 1199.21,1590 ; 1199.21,1590 ccw(c1199.21,1530.79) 1157.34,1572.66 cw(c1199.21,1530.79) 1199.21,1590
  Bottom Layer w10: pad.1@1055,1590 P2.14@1140,1590 1240,1490 1333.2,1490 U6.5@1348.63,1505.43 ; P2.14@1116.78,1582.1 ccw(c1095.78,1574.96) 1101.52,1596.39 ccw(c1105.72,1612.07) P2.14@1119.38,1603.28 ; P2.14@1116.78,1597.9 cw(c1095.78,1605.04) 1101.52,1583.61 cw(c1105.72,1567.93) P2.14@1119.38,1576.72 ; P2.14@1134.64,1588.9 ccw(c1172.3,1596.61) 1162.35,1559.48 ; P2.14@1141.1,1595.36 cw(c1133.39,1557.7) 1170.52,1567.65 ; 1296.2,1485.26 ccw(c1302.48,1496.14) U6.5@1312.72,1488.87 ; 1305.71,1479.77 ccw(c1311.48,1489.76) U6.5@1320.88,1483.08 ; pad.1@1080.79,1590 cw(c1080.79,1530.79) 1122.66,1572.66 ccw(c1080.79,1530.79) pad.1@1080.79,1590 ; pad.1@1080.79,1590 ccw(c1080.79,1649.21) 1122.66,1607.34 cw(c1080.79,1649.21) pad.1@1080.79,1590 ; pad.1@1086.36,1577.01 cw(c1099.56,1568.97) 1103.56,1583.9 ; pad.1@1086.36,1577.01 cw(c1099.56,1568.97) 1103.56,1583.9 ; pad.1@1086.36,1577.01 cw(c1099.56,1568.97) 1103.56,1583.9 ; pad.1@1086.36,1602.99 ccw(c1099.56,1611.03) 1103.56,1596.1 ; pad.1@1086.36,1602.99 ccw(c1099.56,1611.03) 1103.56,1596.1 ; pad.1@1086.36,1602.99 ccw(c1099.56,1611.03) 1103.56,1596.1 ; pad.1@1088.73,1582.12 cw(c1109.12,1575.35) 1103.56,1596.1 ; pad.1@1088.73,1582.12 cw(c1109.12,1575.35) 1103.56,1596.1 ; pad.1@1088.73,1582.12 cw(c1109.12,1575.35) 1103.56,1596.1 ; pad.1@1088.73,1597.88 ccw(c1109.12,1604.65) 1103.56,1583.9 ; pad.1@1088.73,1597.88 ccw(c1109.12,1604.65) 1103.56,1583.9 ; pad.1@1088.73,1597.88 ccw(c1109.12,1604.65) 1103.56,1583.9 ; 1101.21,1590 cw(c1101.21,1626.21) 1075.61,1600.61 ccw(c1101.21,1626.21) 1101.21,1590 ; 1101.21,1590 ccw(c1101.21,1553.79) 1075.61,1579.39 cw(c1101.21,1553.79) 1101.21,1590 ; 1104.93,1590 cw(c1104.93,1554.93) 1129.73,1579.73 ccw(c1104.93,1554.93) 1104.93,1590 ; 1104.93,1590 ccw(c1104.93,1625.07) 1129.73,1600.27 cw(c1104.93,1625.07) 1104.93,1590 ; P2.14@1125.36,1590 cw(c1125.36,1650.36) 1082.68,1607.68 ccw(c1125.36,1650.36) P2.14@1125.36,1590 ; P2.14@1125.36,1590 ccw(c1125.36,1529.64) 1082.68,1572.32 cw(c1125.36,1529.64) P2.14@1125.36,1590 ; 1164.8,1565.2 cw(c1189.6,1590) 1154.53,1590 ccw(c1189.6,1590) 1164.8,1565.2 ; 1164.8,1565.2 ccw(c1140,1540.4) 1140,1575.47 cw(c1140,1540.4) 1164.8,1565.2 ; 1181.87,1548.13 cw(c1223.74,1590) 1164.53,1590 ccw(c1223.74,1590) 1181.87,1548.13 ; 1181.87,1548.13 ccw(c1140,1506.26) 1140,1565.47 cw(c1140,1506.26) 1181.87,1548.13 ; 1277.8,1490 cw(c1277.8,1438.96) 1313.89,1475.05 ccw(c1277.8,1438.96) 1277.8,1490 ; 1301.94,1490 cw(c1301.94,1463.11) 1320.96,1482.12 ccw(c1301.94,1463.11) 1301.94,1490
PA8: P4.7 pad.1@1740,1105 U1.29 U2.41 | length 2391.9
  Top Layer w6: U1.29@1757.25,1880.99 1778.24,1860 1831.4,1860 U2.41@1855.67,1835.73
  Top Layer w9: U2.41@1855.67,1835.73 1891.5,1799.9 1891.5,1702.5 v1(1884,1695) ; 1881.83,1709.17 ccw(c1891.45,1703.61) v1@1884.18,1695.21 ; 1887.28,1718.6 ccw(c1898.71,1712) v1@1890.07,1702.02 ; v1@1877.44,1701.56 ccw(c1843.49,1735.51) 1891.5,1735.51 cw(c1843.49,1735.51) v1@1877.44,1701.56 ; v1@1883.8,1695.2 ccw(c1865.22,1713.78) 1891.5,1713.78 cw(c1865.22,1713.78) v1@1883.8,1695.2
  Top Layer w10: 1691.06,1248.94 cw(c1632.12,1190) P4.7@1715.47,1190 ; v1(1695,1395) 1690.22,1390.22 1690.22,1350 1680.22,1340 1680.22,1284.78 1680.22,1259.78 1740,1200 P4.7@1740,1190 ; 1708.13,1231.87 cw(c1666.26,1190) P4.7@1725.47,1190 ; 1715.2,1224.8 ccw(c1740,1249.6) P4.7@1740,1214.53
  Bottom Layer w9: 1695,1427.67 1660,1462.67 1660,1540 1785,1665 1854,1665 v1(1884,1695) ; 1868.16,1679.16 cw(c1884,1663.32) 1884,1685.72 ccw(c1884,1663.32) 1868.16,1679.16 ; 1868.16,1679.16 ccw(c1852.32,1695) 1874.72,1695 cw(c1852.32,1695) 1868.16,1679.16
  Bottom Layer w10: v1@1695,1400 1695,1427.67 ; P4.7@1726.72,1169.38 cw(c1717.93,1155.72) 1733.61,1151.52 cw(c1755.04,1145.78) P4.7@1747.9,1166.78 ; P4.7@1732.1,1166.78 cw(c1724.96,1145.78) 1746.39,1151.52 cw(c1762.07,1155.72) P4.7@1753.28,1169.38 ; pad.1@1740,1110 P4.7@1740,1190 ; 1695,1416.2 cw(c1673.8,1416.2) 1688.79,1401.21 ccw(c1673.8,1416.2) 1695,1416.2 ; 1695,1416.2 ccw(c1716.2,1416.2) 1701.21,1401.21 cw(c1716.2,1416.2) 1695,1416.2 ; pad.1@1727.01,1136.36 ccw(c1718.97,1149.56) 1733.9,1153.56 ; pad.1@1727.01,1136.36 ccw(c1718.97,1149.56) 1733.9,1153.56 ; pad.1@1727.01,1136.36 ccw(c1718.97,1149.56) 1733.9,1153.56 ; pad.1@1732.12,1138.73 ccw(c1725.35,1159.12) 1746.1,1153.56 ; pad.1@1732.12,1138.73 ccw(c1725.35,1159.12) 1746.1,1153.56 ; pad.1@1732.12,1138.73 ccw(c1725.35,1159.12) 1746.1,1153.56 ; 1733.9,1153.56 ccw(c1754.65,1159.12) pad.1@1747.88,1138.73 ; 1733.9,1153.56 ccw(c1754.65,1159.12) pad.1@1747.88,1138.73 ; 1733.9,1153.56 ccw(c1754.65,1159.12) pad.1@1747.88,1138.73 ; pad.1@1740,1130.79 cw(c1799.21,1130.79) 1757.34,1172.66 ccw(c1799.21,1130.79) pad.1@1740,1130.79 ; pad.1@1740,1130.79 ccw(c1680.79,1130.79) 1722.66,1172.66 cw(c1680.79,1130.79) pad.1@1740,1130.79 ; 1740,1151.21 cw(c1703.79,1151.21) 1729.39,1125.61 ccw(c1703.79,1151.21) 1740,1151.21 ; 1740,1151.21 ccw(c1776.21,1151.21) 1750.61,1125.61 cw(c1776.21,1151.21) 1740,1151.21 ; 1740,1154.93 cw(c1775.07,1154.93) 1750.27,1179.73 ccw(c1775.07,1154.93) 1740,1154.93 ; 1740,1154.93 ccw(c1704.93,1154.93) 1729.73,1179.73 cw(c1704.93,1154.93) 1740,1154.93 ; P4.7@1740,1175.36 cw(c1679.64,1175.36) 1722.32,1132.68 ccw(c1679.64,1175.36) P4.7@1740,1175.36 ; P4.7@1740,1175.36 ccw(c1800.36,1175.36) 1757.68,1132.68 cw(c1800.36,1175.36) P4.7@1740,1175.36 ; 1746.1,1153.56 ccw(c1761.03,1149.56) pad.1@1752.99,1136.36 ; 1746.1,1153.56 ccw(c1761.03,1149.56) pad.1@1752.99,1136.36 ; 1746.1,1153.56 ccw(c1761.03,1149.56) pad.1@1752.99,1136.36
PA9: P3.3 P4.8 pad.1@1840,1105 U1.30 U2.42 | length 3915.9
  Top Layer w6: U1.30@1771.17,1894.91 1791.08,1875 1844.24,1875 U2.42@1869.59,1849.65
  Top Layer w10: v1@1705,1330 v1(1705,1329) 1705,1325 P4.8@1840,1190 ; v1@1705.41,1330.15 cw(c1699.33,1313.14) 1716.78,1317.82 ; 1809.48,1212.35 ccw(c1846.61,1222.3) P4.8@1838.9,1184.64 ; 1817.65,1220.52 cw(c1807.7,1183.39) P4.8@1845.36,1191.1 ; U2.42@1869.59,1849.65 1907,1812.24 1907,1719 v1(1928.22,1697.78) ; 1916.99,1706.93 ccw(c1930.86,1710.65) v1@1927.98,1696.58 ; 1919.07,1709.01 cw(c1915.35,1695.14) v1@1929.42,1698.02 ; 1798.13,1231.87 cw(c1756.26,1190) 1815.47,1190 ccw(c1756.26,1190) 1798.13,1231.87 ; 1798.13,1231.87 ccw(c1840,1273.74) 1840,1214.53 cw(c1840,1273.74) 1798.13,1231.87 ; 1815.2,1214.8 cw(c1790.4,1190) 1825.47,1190 ccw(c1790.4,1190) 1815.2,1214.8 ; 1815.2,1214.8 ccw(c1840,1239.6) 1840,1204.53 cw(c1840,1239.6) 1815.2,1214.8 ; 1913.23,1712.77 cw(c1898.25,1697.78) 1919.44,1697.78 ccw(c1898.25,1697.78) 1913.23,1712.77 ; 1913.23,1712.77 ccw(c1928.22,1727.75) 1928.22,1706.56 cw(c1928.22,1727.75) 1913.23,1712.77 ; v1@1705,1320.22 cw(c1705,1308.68) 1713.16,1316.84 ccw(c1705,1308.68) v1@1705,1320.22 ; v1@1713.78,1329 ccw(c1744.63,1329) 1722.82,1307.18 cw(c1744.63,1329) v1@1713.78,1329
  Bottom Layer w10: P3.3@1426.3,1382.81 ccw(c1462.29,1401.69) 1452.13,1362.34 ; P3.3@1435.15,1387.46 ccw(c1489.22,1415.82) 1473.96,1356.71 ; P3.3@1444.01,1392.1 ccw(c1516.14,1429.95) 1495.79,1351.08 ; P3.3@1444.2,1391.7 ccw(c1483.3,1407.56) 1472.38,1366.8 ; P3.3@1453.46,1395.46 ccw(c1506.63,1417.02) 1491.78,1361.6 ; P3.3@1454.29,1392.6 ccw(c1472.49,1395.92) 1467.7,1378.05 ; 1470,1385 1526.53,1328.47 v1@1703.47,1328.47 ; v1@1705,1330 1752.67,1330 1806,1383.33 1806,1433.27 2046,1673.27 2046,1711.67 2007.89,1749.78 1939.74,1749.78 1925.22,1735.26 1925.22,1700.78 v1(1928.22,1697.78) ; P4.8@1826.72,1169.38 cw(c1817.93,1155.72) 1833.61,1151.52 cw(c1855.04,1145.78) P4.8@1847.9,1166.78 ; P4.8@1832.1,1166.78 cw(c1824.96,1145.78) 1846.39,1151.52 cw(c1862.07,1155.72) P4.8@1853.28,1169.38 ; P4.8@1835,1195 P4.8@1840,1190 pad.1@1840,1110 ; pad.1@1827.01,1136.36 ccw(c1818.97,1149.56) 1833.9,1153.56 ; pad.1@1827.01,1136.36 ccw(c1818.97,1149.56) 1833.9,1153.56 ; pad.1@1827.01,1136.36 ccw(c1818.97,1149.56) 1833.9,1153.56 ; pad.1@1832.12,1138.73 ccw(c1825.35,1159.12) 1846.1,1153.56 ; pad.1@1832.12,1138.73 ccw(c1825.35,1159.12) 1846.1,1153.56 ; pad.1@1832.12,1138.73 ccw(c1825.35,1159.12) 1846.1,1153.56 ; 1833.9,1153.56 ccw(c1854.65,1159.12) pad.1@1847.88,1138.73 ; 1833.9,1153.56 ccw(c1854.65,1159.12) pad.1@1847.88,1138.73 ; 1833.9,1153.56 ccw(c1854.65,1159.12) pad.1@1847.88,1138.73 ; pad.1@1840,1130.79 cw(c1899.21,1130.79) 1857.34,1172.66 ccw(c1899.21,1130.79) pad.1@1840,1130.79 ; pad.1@1840,1130.79 ccw(c1780.79,1130.79) 1822.66,1172.66 cw(c1780.79,1130.79) pad.1@1840,1130.79 ; 1840,1151.21 cw(c1803.79,1151.21) 1829.39,1125.61 ccw(c1803.79,1151.21) 1840,1151.21 ; 1840,1151.21 ccw(c1876.21,1151.21) 1850.61,1125.61 cw(c1876.21,1151.21) 1840,1151.21 ; 1840,1154.93 cw(c1875.07,1154.93) 1850.27,1179.73 ccw(c1875.07,1154.93) 1840,1154.93 ; 1840,1154.93 ccw(c1804.93,1154.93) 1829.73,1179.73 cw(c1804.93,1154.93) 1840,1154.93 ; P4.8@1840,1175.36 cw(c1779.64,1175.36) 1822.32,1132.68 ccw(c1779.64,1175.36) P4.8@1840,1175.36 ; P4.8@1840,1175.36 ccw(c1900.36,1175.36) 1857.68,1132.68 cw(c1900.36,1175.36) P4.8@1840,1175.36 ; 1846.1,1153.56 ccw(c1861.03,1149.56) pad.1@1852.99,1136.36 ; 1846.1,1153.56 ccw(c1861.03,1149.56) pad.1@1852.99,1136.36 ; 1846.1,1153.56 ccw(c1861.03,1149.56) pad.1@1852.99,1136.36 ; P3.3@1440,1365.47 cw(c1440,1245.9) 1524.55,1330.45 ccw(c1440,1245.9) P3.3@1440,1365.47 ; P3.3@1440,1375.47 cw(c1440,1280.04) 1507.48,1347.52 ccw(c1440,1280.04) P3.3@1440,1375.47 ; P3.3@1440,1385.47 cw(c1440,1314.19) 1490.41,1364.59 ccw(c1440,1314.19) P3.3@1440,1385.47 ; P3.3@1440,1395.47 cw(c1440,1348.33) 1473.34,1381.66 ccw(c1440,1348.33) P3.3@1440,1395.47 ; v1@1711.21,1322.79 cw(c1728.61,1305.39) 1728.61,1330 ccw(c1728.61,1305.39) v1@1711.21,1322.79 ; v1@1711.21,1335.21 ccw(c1723.78,1347.78) 1723.78,1330 cw(c1723.78,1347.78) v1@1711.21,1335.21
PA10: P3.2 P4.9 pad.1@1940,1105 U1.31 U2.43 | length 3093.5
  Top Layer w6: U1.31@1785.09,1908.83 1803.92,1890 1857.08,1890 U2.43@1883.51,1863.57
  Top Layer w10: v1(1715,1365) 1715,1362.83 1786.64,1291.19 1806.19,1291.19 1907.37,1190 ; v1@1715.34,1366.17 cw(c1710.79,1350.53) 1726.53,1354.75 ; U2.43@1883.51,1863.57 1923,1824.08 1923,1752 v1@1945,1730 ; 1938.77,1734.15 ccw(c1952.64,1737.87) v1@1949.76,1723.8 ; P4.9@1940,1190 1907.37,1190 ; 1940.85,1736.23 cw(c1937.13,1722.36) v1@1951.2,1725.24 ; 1907.37,1190 cw(c1907.37,1180.56) 1916.44,1183.19 ccw(c1907.37,1180.56) 1907.37,1190 ; 1907.37,1190 ccw(c1907.37,1199.44) 1916.44,1196.81 cw(c1907.37,1199.44) 1907.37,1190 ; 1935.01,1739.99 cw(c1920.02,1725) 1941.22,1725 ccw(c1920.02,1725) 1935.01,1739.99 ; 1935.01,1739.99 ccw(c1950,1754.98) 1950,1733.78 cw(c1950,1754.98) 1935.01,1739.99 ; v1@1715,1356.22 cw(c1715,1340.26) 1726.28,1351.55 ccw(c1715,1340.26) v1@1715,1356.22 ; v1@1723.78,1365 ccw(c1750.21,1365) 1731.52,1346.31 cw(c1750.21,1365) v1@1723.78,1365
  Bottom Layer w10: P3.2@1534.64,1388.9 ccw(c1572.3,1396.61) 1562.35,1359.48 ; P3.2@1540,1390 1585.53,1344.47 1685,1344.47 v1@1702.03,1361.5 ; P3.2@1541.1,1395.36 cw(c1533.39,1357.7) 1570.52,1367.65 ; v1@1715,1361.5 1761.54,1361.5 1790,1389.96 1790,1445 ; 1790.04,1445 2030,1684.96 2030,1705.04 2010.04,1725 v1(1950,1725) ; P4.9@1926.72,1169.38 cw(c1917.93,1155.72) 1933.61,1151.52 cw(c1955.04,1145.78) P4.9@1947.9,1166.78 ; P4.9@1932.1,1166.78 cw(c1924.96,1145.78) 1946.39,1151.52 cw(c1962.07,1155.72) P4.9@1953.28,1169.38 ; pad.1@1940,1110 P4.9@1940,1190 ; 1564.8,1365.2 cw(c1589.6,1390) 1554.53,1390 ccw(c1589.6,1390) 1564.8,1365.2 ; 1564.8,1365.2 ccw(c1540,1340.4) 1540,1375.47 cw(c1540,1340.4) 1564.8,1365.2 ; 1581.87,1348.13 cw(c1623.74,1390) 1564.53,1390 ccw(c1623.74,1390) 1581.87,1348.13 ; 1581.87,1348.13 ccw(c1540,1306.26) 1540,1365.47 cw(c1540,1306.26) 1581.87,1348.13 ; pad.1@1927.01,1136.36 ccw(c1918.97,1149.56) 1933.9,1153.56 ; pad.1@1927.01,1136.36 ccw(c1918.97,1149.56) 1933.9,1153.56 ; pad.1@1927.01,1136.36 ccw(c1918.97,1149.56) 1933.9,1153.56 ; pad.1@1932.12,1138.73 ccw(c1925.35,1159.12) 1946.1,1153.56 ; pad.1@1932.12,1138.73 ccw(c1925.35,1159.12) 1946.1,1153.56 ; pad.1@1932.12,1138.73 ccw(c1925.35,1159.12) 1946.1,1153.56 ; 1933.9,1153.56 ccw(c1954.65,1159.12) pad.1@1947.88,1138.73 ; 1933.9,1153.56 ccw(c1954.65,1159.12) pad.1@1947.88,1138.73 ; 1933.9,1153.56 ccw(c1954.65,1159.12) pad.1@1947.88,1138.73 ; pad.1@1940,1130.79 cw(c1999.21,1130.79) 1957.34,1172.66 ccw(c1999.21,1130.79) pad.1@1940,1130.79 ; pad.1@1940,1130.79 ccw(c1880.79,1130.79) 1922.66,1172.66 cw(c1880.79,1130.79) pad.1@1940,1130.79 ; 1940,1151.21 cw(c1903.79,1151.21) 1929.39,1125.61 ccw(c1903.79,1151.21) 1940,1151.21 ; 1940,1151.21 ccw(c1976.21,1151.21) 1950.61,1125.61 cw(c1976.21,1151.21) 1940,1151.21 ; 1940,1154.93 cw(c1975.07,1154.93) 1950.27,1179.73 ccw(c1975.07,1154.93) 1940,1154.93 ; 1940,1154.93 ccw(c1904.93,1154.93) 1929.73,1179.73 cw(c1904.93,1154.93) 1940,1154.93 ; P4.9@1940,1175.36 cw(c1879.64,1175.36) 1922.32,1132.68 ccw(c1879.64,1175.36) P4.9@1940,1175.36 ; P4.9@1940,1175.36 ccw(c2000.36,1175.36) 1957.68,1132.68 cw(c2000.36,1175.36) P4.9@1940,1175.36 ; 1946.1,1153.56 ccw(c1961.03,1149.56) pad.1@1952.99,1136.36 ; 1946.1,1153.56 ccw(c1961.03,1149.56) pad.1@1952.99,1136.36 ; 1946.1,1153.56 ccw(c1961.03,1149.56) pad.1@1952.99,1136.36 ; 1971.2,1725 cw(c1971.2,1746.2) 1956.21,1731.21 ccw(c1971.2,1746.2) 1971.2,1725 ; 1971.2,1725 ccw(c1971.2,1703.8) 1956.21,1718.79 cw(c1971.2,1703.8) 1971.2,1725 ; v1@1721.21,1371.21 ccw(c1744.65,1394.65) 1744.65,1361.5 cw(c1744.65,1394.65) v1@1721.21,1371.21
PA11: P4.10 pad.1@2040,1105 R7.1 U1.32 U2.44 | length 3006.5
  Top Layer w6: U1.32@1799.01,1922.75 1816.76,1905 1869.92,1905 U2.44@1897.43,1877.49
  Top Layer w10: v1(1730.22,1400) 1730.22,1384.82 ; 1739.78,1375.22 1765,1350 ; U2.44@1897.43,1877.49 1897.43,1876.57 1939,1835 1939,1773.57 1980,1732.57 ; v1(1970,1695) 1980,1705 ; 1975.65,1715.94 ccw(c1984.62,1708.91) v1@1976.36,1701.05 ; 1999.18,1239.9 1999.08,1240 1880,1240 1794.57,1325.43 R7.1@1794.57,1350 1765,1350 ; 2014.05,1206.79 ccw(c2057.26,1212.13) P4.10@2030.48,1177.8 ; 2022.44,1219.23 cw(c2014.39,1189.2) P4.10@2045.47,1190.17 ; P4.10@2040,1190 2040,1200.5 1999.89,1240.61 ; 1730.22,1384.82 cw(c1738.95,1384.82) 1734.6,1392.39 ccw(c1738.95,1384.82) 1730.22,1384.82 ; 1730.22,1384.82 ccw(c1721.49,1384.82) 1725.84,1392.39 cw(c1721.49,1384.82) 1730.22,1384.82 ; 1730.22,1384.82 1739.78,1375.26 ; 1739.78,1375.26 cw(c1751.12,1386.61) 1737.61,1395.26 ccw(c1751.12,1386.61) 1739.78,1375.26 ; 1765,1350 cw(c1765,1335.84) 1777.77,1341.96 ccw(c1765,1335.84) 1765,1350 ; 1765,1350 ccw(c1765,1364.16) 1777.77,1358.04 cw(c1765,1364.16) 1765,1350 ; 1980,1705 cw(c1975.05,1709.95) 1972.81,1703.32 ccw(c1975.05,1709.95) 1980,1705 ; 1980,1705 ccw(c1984.95,1700.05) 1978.32,1697.81 cw(c1984.95,1700.05) 1980,1705 ; 1980,1705 1980,1732.57 ; 1980,1732.57 cw(c1941.8,1732.57) 1964.73,1702.02 ccw(c1941.8,1732.57) 1980,1732.57 ; 1999.89,1240.61 cw(c1960.41,1201.12) 2015.71,1193.4 ccw(c1960.41,1201.12) 1999.89,1240.61 ; v1@1729.19,1400.66 ccw(c1740.41,1393.47) 1730.99,1384.05 cw(c1740.41,1393.47) v1@1729.19,1400.66 ; v1@1970.73,1694.02 ccw(c1956.82,1712.57) 1980,1712.57 cw(c1956.82,1712.57) v1@1970.73,1694.02 ; 2014.09,1226.41 cw(c1985.32,1197.64) 2025.61,1192.01 ccw(c1985.32,1197.64) 2014.09,1226.41 ; 2016.05,1224.45 ccw(c2040,1248.39) 2040,1214.53 cw(c2040,1248.39) 2016.05,1224.45
  Bottom Layer w10: v1(1730.22,1400) 1730.22,1400.26 1750,1420.04 1750,1465 1970,1685 v1(1970,1695) ; 1957.41,1680.77 cw(c1981.33,1674.36) v1@1969.41,1696.07 ; P4.10@2026.72,1169.38 cw(c2017.93,1155.72) 2033.61,1151.52 cw(c2055.04,1145.78) P4.10@2047.9,1166.78 ; P4.10@2032.1,1166.78 cw(c2024.96,1145.78) 2046.39,1151.52 cw(c2062.07,1155.72) P4.10@2053.28,1169.38 ; pad.1@2040,1110 P4.10@2040,1190 ; pad.1@2027.01,1136.36 ccw(c2018.97,1149.56) 2033.9,1153.56 ; pad.1@2027.01,1136.36 ccw(c2018.97,1149.56) 2033.9,1153.56 ; pad.1@2027.01,1136.36 ccw(c2018.97,1149.56) 2033.9,1153.56 ; pad.1@2032.12,1138.73 ccw(c2025.35,1159.12) 2046.1,1153.56 ; pad.1@2032.12,1138.73 ccw(c2025.35,1159.12) 2046.1,1153.56 ; pad.1@2032.12,1138.73 ccw(c2025.35,1159.12) 2046.1,1153.56 ; 2033.9,1153.56 ccw(c2054.65,1159.12) pad.1@2047.88,1138.73 ; 2033.9,1153.56 ccw(c2054.65,1159.12) pad.1@2047.88,1138.73 ; 2033.9,1153.56 ccw(c2054.65,1159.12) pad.1@2047.88,1138.73 ; pad.1@2040,1130.79 cw(c2099.21,1130.79) 2057.34,1172.66 ccw(c2099.21,1130.79) pad.1@2040,1130.79 ; pad.1@2040,1130.79 ccw(c1980.79,1130.79) 2022.66,1172.66 cw(c1980.79,1130.79) pad.1@2040,1130.79 ; 2040,1151.21 cw(c2003.79,1151.21) 2029.39,1125.61 ccw(c2003.79,1151.21) 2040,1151.21 ; 2040,1151.21 ccw(c2076.21,1151.21) 2050.61,1125.61 cw(c2076.21,1151.21) 2040,1151.21 ; 2040,1154.93 cw(c2075.07,1154.93) 2050.27,1179.73 ccw(c2075.07,1154.93) 2040,1154.93 ; 2040,1154.93 ccw(c2004.93,1154.93) 2029.73,1179.73 cw(c2004.93,1154.93) 2040,1154.93 ; P4.10@2040,1175.36 cw(c1979.64,1175.36) 2022.32,1132.68 ccw(c1979.64,1175.36) P4.10@2040,1175.36 ; P4.10@2040,1175.36 ccw(c2100.36,1175.36) 2057.68,1132.68 cw(c2100.36,1175.36) P4.10@2040,1175.36 ; 2046.1,1153.56 ccw(c2061.03,1149.56) pad.1@2052.99,1136.36 ; 2046.1,1153.56 ccw(c2061.03,1149.56) pad.1@2052.99,1136.36 ; 2046.1,1153.56 ccw(c2061.03,1149.56) pad.1@2052.99,1136.36 ; v1@1730.22,1408.78 ccw(c1730.22,1429.34) 1744.76,1414.8 cw(c1730.22,1429.34) v1@1730.22,1408.78 ; v1@1739,1400 cw(c1760.83,1400) 1745.39,1415.44 ccw(c1760.83,1400) v1@1739,1400 ; 1947.94,1662.94 ccw(c1915.88,1695) 1961.22,1695 cw(c1915.88,1695) 1947.94,1662.94 ; 1965.01,1680.01 ccw(c1950.02,1695) 1971.22,1695 cw(c1950.02,1695) 1965.01,1680.01
PA12: P4.11 pad.1@2140,1105 R6.1 U1.33 U2.45 | length 3568.5
  Top Layer w6: U1.33@1812.93,1936.67 1829.6,1920 1882.76,1920 U2.45@1911.34,1891.41
  Top Layer w10: R6.1@1794.57,1416.74 1829.19,1382.12 ; R6.1@1795.21,1427.28 cw(c1773.34,1386.2) 1818.99,1395.22 ; U2.45@1911.34,1891.41 1955,1847.76 1955,1780.2 2005,1730.2 v1(2005,1695) ; 2080.38,1228.41 cw(c2060.39,1142.56) P4.11@2136.11,1187.68 ; 2083.75,1219.6 cw(c2066.39,1154.84) P4.11@2126.89,1183.74 ; 2094.13,1206.82 ccw(c2105.59,1249.59) P4.11@2127.74,1211.24 ; 2103.27,1223.08 cw(c2088.4,1159.26) P4.11@2144.7,1192.8 ; 2104.71,1213.98 cw(c2092.17,1167.15) P4.11@2135.91,1188.05 ; 2108.35,1203.01 cw(c2101.78,1178.48) P4.11@2126.09,1185.81 ; 2126.16,1217.75 cw(c2116.42,1175.95) P4.11@2153.29,1197.92 ; P4.11@2145,1195 2145,1190 P4.11@2140,1190 2110,1190 ; 1829.19,1382.12 cw(c1868.21,1421.14) 1813.15,1424.82 ccw(c1868.21,1421.14) 1829.19,1382.12 ; 1829.19,1382.12 1829.19,1313.44 1886.02,1256.61 2043.39,1256.61 ; 2005,1716.2 cw(c1983.8,1716.2) 1998.79,1701.21 ccw(c1983.8,1716.2) 2005,1716.2 ; 2005,1716.2 ccw(c2026.2,1716.2) 2011.21,1701.21 cw(c2026.2,1716.2) 2005,1716.2 ; 2043.39,1256.61 2110,1190 ; 2043.39,1256.61 2046.92,1253.08 ; 2046.92,1253.08 ccw(c2140,1346.17) 2140,1214.53 cw(c2140,1346.17) 2046.92,1253.08 ; 2110,1190 cw(c2110,1183.92) 2115.96,1185.13 ccw(c2110,1183.92) 2110,1190 ; 2110,1190 ccw(c2110,1196.08) 2115.96,1194.87 cw(c2110,1196.08) 2110,1190 ; R6.1@1794.57,1407.44 cw(c1794.57,1384.99) 1810.44,1400.87 ccw(c1794.57,1384.99) R6.1@1794.57,1407.44 ; R6.1@1803.17,1425.49 ccw(c1839,1423.09) 1813.61,1397.7 cw(c1839,1423.09) R6.1@1803.17,1425.49 ; 2063.99,1236.01 ccw(c2140,1312.03) 2140,1204.53 cw(c2140,1312.03) 2063.99,1236.01 ; 2081.06,1218.94 ccw(c2140,1277.88) 2140,1194.53 cw(c2140,1277.88) 2081.06,1218.94 ; 2098.13,1201.87 ccw(c2140,1243.74) 2140,1184.53 cw(c2140,1243.74) 2098.13,1201.87
  Bottom Layer w10: v1(1765,1400) 1774,1409 1774,1464 1980.22,1670.22 ; 1980.26,1670.22 1994.78,1684.74 ; 1994.78,1684.78 v1(2005,1695) ; P4.11@2126.72,1169.38 cw(c2117.93,1155.72) 2133.61,1151.52 cw(c2155.04,1145.78) P4.11@2147.9,1166.78 ; P4.11@2132.1,1166.78 cw(c2124.96,1145.78) 2146.39,1151.52 cw(c2162.07,1155.72) P4.11@2153.28,1169.38 ; pad.1@2140,1110 P4.11@2140,1190 ; pad.1@2127.01,1136.36 ccw(c2118.97,1149.56) 2133.9,1153.56 ; pad.1@2127.01,1136.36 ccw(c2118.97,1149.56) 2133.9,1153.56 ; pad.1@2127.01,1136.36 ccw(c2118.97,1149.56) 2133.9,1153.56 ; pad.1@2132.12,1138.73 ccw(c2125.35,1159.12) 2146.1,1153.56 ; pad.1@2132.12,1138.73 ccw(c2125.35,1159.12) 2146.1,1153.56 ; pad.1@2132.12,1138.73 ccw(c2125.35,1159.12) 2146.1,1153.56 ; 2133.9,1153.56 ccw(c2154.65,1159.12) pad.1@2147.88,1138.73 ; 2133.9,1153.56 ccw(c2154.65,1159.12) pad.1@2147.88,1138.73 ; 2133.9,1153.56 ccw(c2154.65,1159.12) pad.1@2147.88,1138.73 ; pad.1@2140,1130.79 cw(c2199.21,1130.79) 2157.34,1172.66 ccw(c2199.21,1130.79) pad.1@2140,1130.79 ; pad.1@2140,1130.79 ccw(c2080.79,1130.79) 2122.66,1172.66 cw(c2080.79,1130.79) pad.1@2140,1130.79 ; 2140,1151.21 cw(c2103.79,1151.21) 2129.39,1125.61 ccw(c2103.79,1151.21) 2140,1151.21 ; 2140,1151.21 ccw(c2176.21,1151.21) 2150.61,1125.61 cw(c2176.21,1151.21) 2140,1151.21 ; 2140,1154.93 cw(c2175.07,1154.93) 2150.27,1179.73 ccw(c2175.07,1154.93) 2140,1154.93 ; 2140,1154.93 ccw(c2104.93,1154.93) 2129.73,1179.73 cw(c2104.93,1154.93) 2140,1154.93 ; P4.11@2140,1175.36 cw(c2079.64,1175.36) 2122.32,1132.68 ccw(c2079.64,1175.36) P4.11@2140,1175.36 ; P4.11@2140,1175.36 ccw(c2200.36,1175.36) 2157.68,1132.68 cw(c2200.36,1175.36) P4.11@2140,1175.36 ; 2146.1,1153.56 ccw(c2161.03,1149.56) pad.1@2152.99,1136.36 ; 2146.1,1153.56 ccw(c2161.03,1149.56) pad.1@2152.99,1136.36 ; 2146.1,1153.56 ccw(c2161.03,1149.56) pad.1@2152.99,1136.36 ; 1989.98,1679.94 ccw(c1974.92,1695) 1996.22,1695 cw(c1974.92,1695) 1989.98,1679.94 ; 1990.09,1680.04 cw(c2005,1665.13) 2005,1686.22 ccw(c2005,1665.13) 1990.09,1680.04